# Altium PCB lightSoakV1-input-buffer-board-pcb.PcbDoc
Units mm, origin at the board's own origin, x right, y up, seen from the top; angles counter-clockwise.
Board outline 34.7 x 30.75 mm, 2 copper layers (Top Layer, Bottom Layer); 26 components, 26 nets, 94 pads, 22 vias.
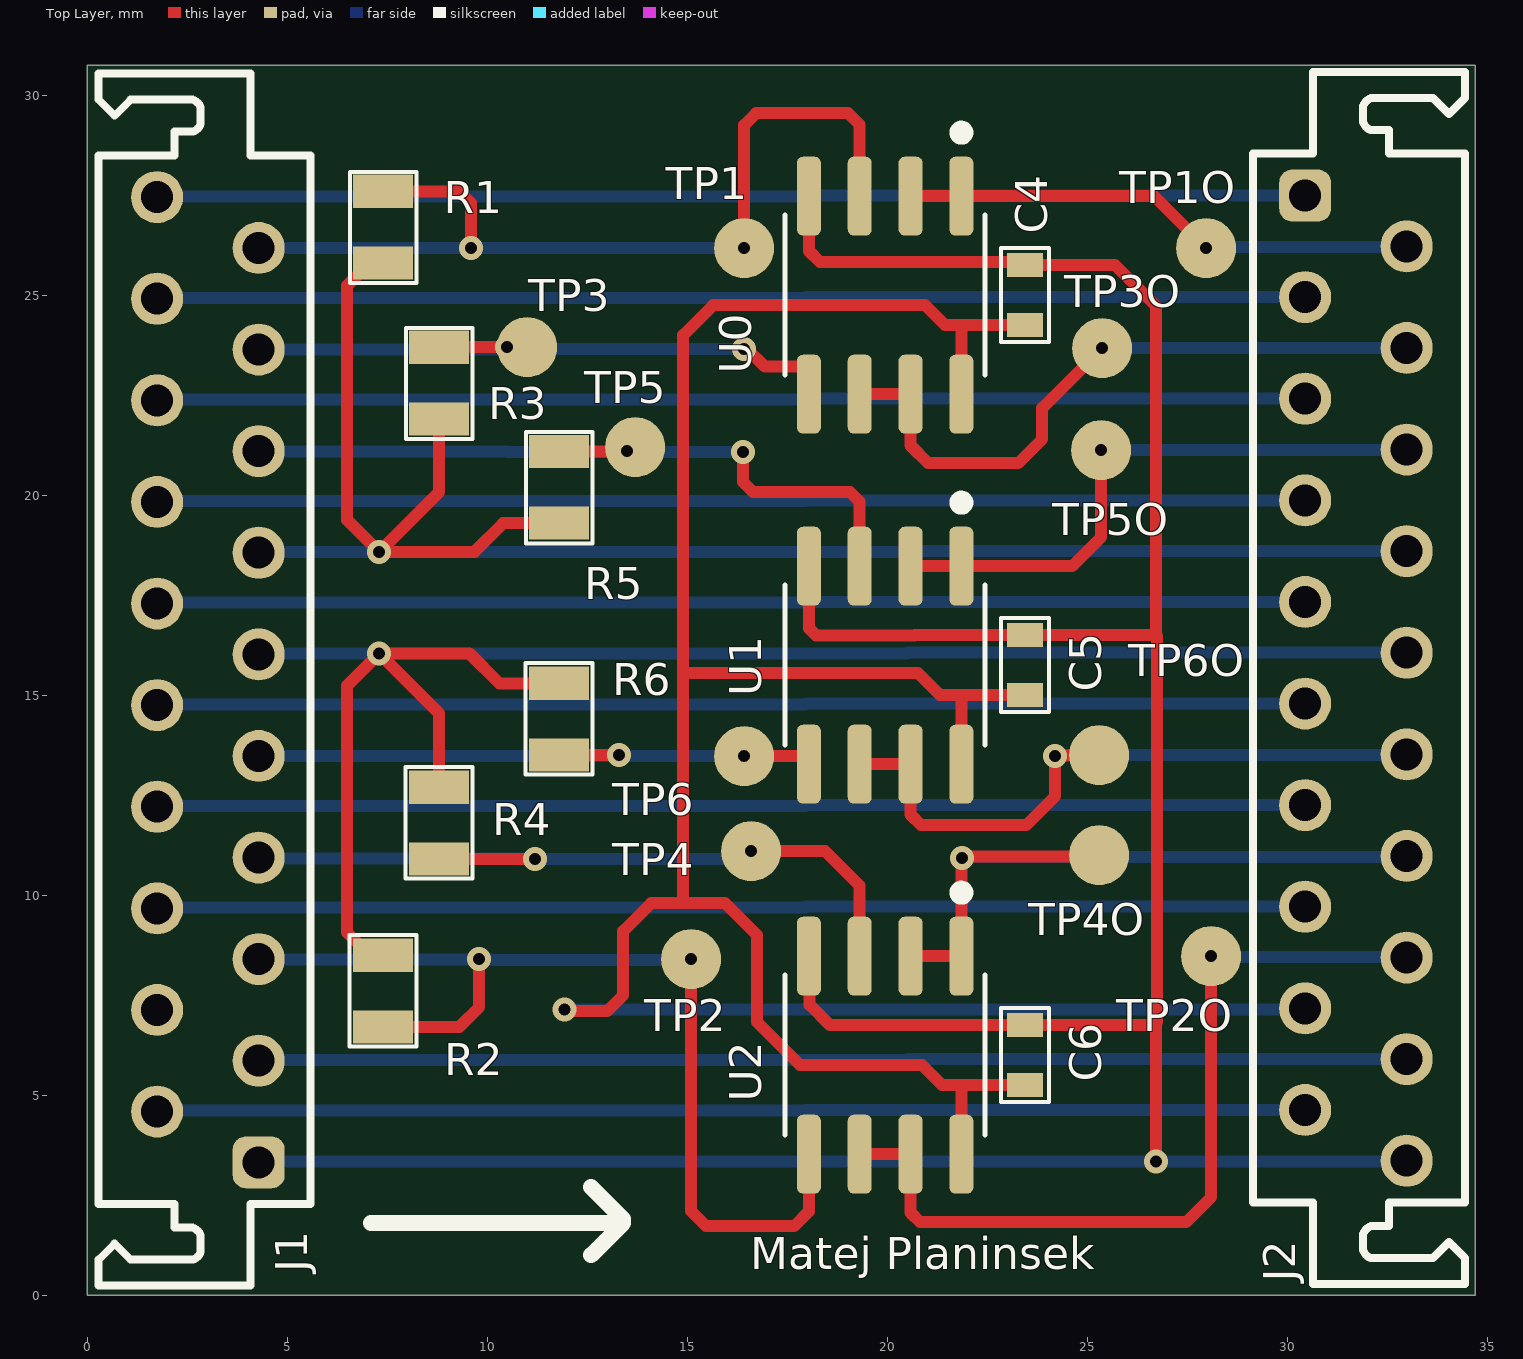
[diagram p0: Top Layer view]
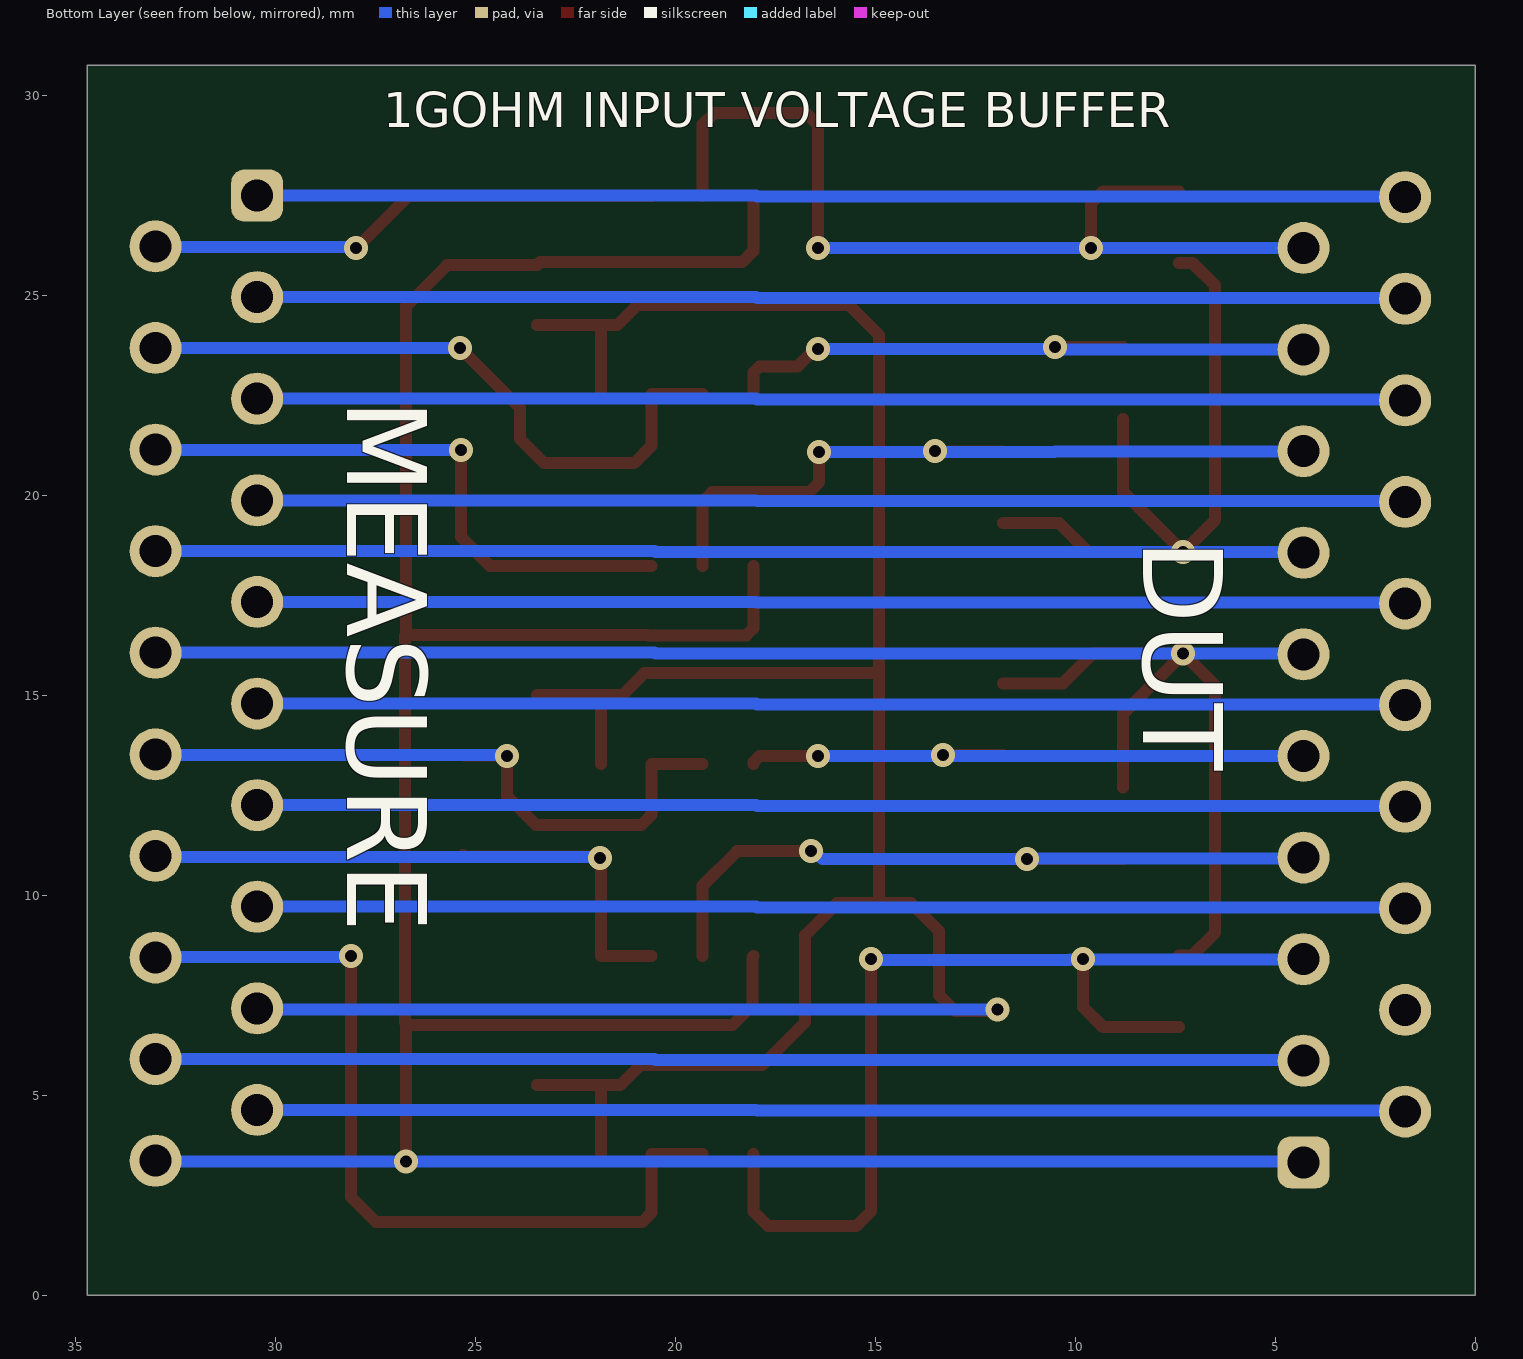
[diagram p1: Bottom Layer view, seen from below]
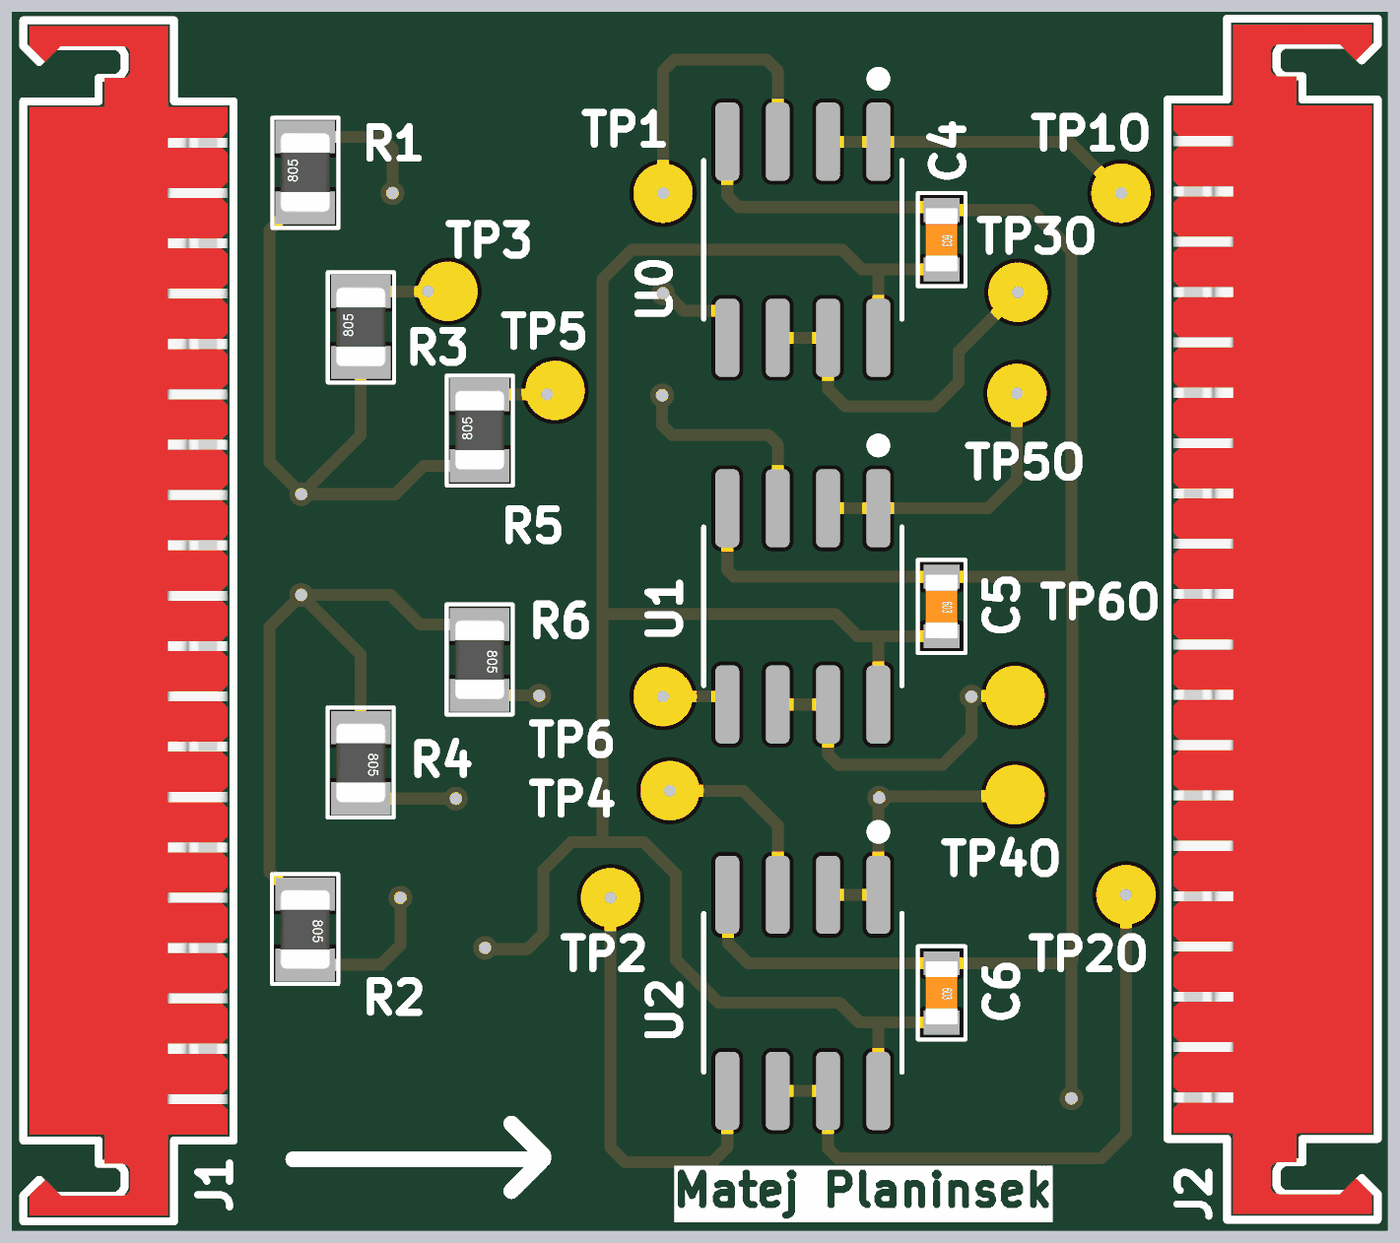
[diagram p2: 3D render of the assembled board from above, using the file's embedded part models]

## Layer stack, top to bottom
Top Solder: solder mask 0.0102, Solder Resist, Dk 3.5
Top Layer: signal copper 0.0356
Dielectric 1: dielectric 0.32, FR-4, Dk 4.8
Bottom Layer: signal copper 0.0356
Bottom Solder: solder mask 0.0102, Solder Resist, Dk 3.5

## Board outline
0,30.75 0,0 34.7,0 34.7,30.75

## Design rules (kind name [scope] priority, off if disabled: settings)
BoardOutlineClearance [All] p1: gap=0.2 ignorepadtopadclearanceinfootprint=FALSE
Clearance "proximity track clearance" [InNet('PROXIMITY') vs InNet('GND')] p1: gap=1.5 ignorepadtopadclearanceinfootprint=TRUE
Clearance "usb dif pair track clearance" [(InNet('USB_N') OR InNet('USB_P')) vs InNet('GND')] p2: gap=0.5 ignorepadtopadclearanceinfootprint=TRUE
Clearance [All] p3: gap=0.15 ignorepadtopadclearanceinfootprint=FALSE except(0.25: Arc-Hole Track-Hole THPad-Hole Via-Hole Fill-Hole Poly-Hole Region-Hole Text-Hole)
ComponentClearance [All] p1: gap=0 collisioncheckmode=3 verticalgap=0 showdistances=TRUE
DiffPairsRouting [All] p1: maxlimit=0.15 minlimit=0.15 mostfreqgap=0.15 toplayer_minwidth=0.2 toplayer_maxwidth=0.335 toplayer_prefwidth=0.335 bottomlayer_minwidth=0.2 bottomlayer_maxwidth=0.335 bottomlayer_prefwidth=0.335 impedanceprofiledriven=TRUE impedanceprofileid={C2F5FF65-82FF-485B-A6D6-999E515194F7} maxuncoupledlength=12.7
Height [All] p1: minheight=0 maxheight=1816.048 prefheight=12.7
HoleSize [All] p1: absolutevalues=TRUE maxlimit=6.3 minlimit=0.3 maxpercent=80.000 minpercent=20.000
HoleToHoleClearance [All] p1: gap=0.25 allowstackedmicrovias=FALSE
MinimumAnnularRing [All] p1: minimumring=0.076
MinimumSolderMaskSliver [All] p1: minsoldermaskwidth=0
PasteMaskExpansion [All] p1: expansion=0 percent=-10.000000
PlaneClearance [All] p1: clearance=0.102
PlaneConnect PlaneConnectPowerPads [InPadClass('PowerPads')] p1: planeconnectstyle=Direct reliefexpansion=0.508 reliefentries=4 reliefconductorwidth=0.254 reliefairgap=0.254
PlaneConnect [All] p2: pad.planeconnectstyle=Relief pad.reliefexpansion=0.3 pad.reliefentries=4 pad.reliefconductorwidth=0.102 pad.reliefairgap=0.102 via.planeconnectstyle=Direct via.reliefexpansion=0.3 via.reliefentries=4 via.reliefconductorwidth=0.127 via.reliefairgap=0.127
PolygonConnect PolygonConnectPowerPads [All vs (InPadClass('PowerPads'))] p1: connectstyle=Direct reliefconductorwidth=0.254 reliefentries=4 polygonreliefangle="90 Angle" airgapwidth=0.254
PolygonConnect [All] p2: thpad.connectstyle=Relief thpad.reliefconductorwidth=0.3 thpad.reliefentries=4 thpad.polygonreliefangle="90 Angle" thpad.airgapwidth=0.2 smdpad.connectstyle=Relief smdpad.reliefconductorwidth=0.2 smdpad.reliefentries=4 smdpad.polygonreliefangle="90 Angle" smdpad.airgapwidth=0.2 via.connectstyle=Direct via.reliefconductorwidth=0.127 via.reliefentries=4 via.polygonreliefangle="90 Angle" via.airgapwidth=0.127
RoutingVias [All] p1: holewidth=0.3 width=0.6 viastyle="Through Hole" minholewidth=0.2 minwidth=0.45 maxholewidth=6.3 maxwidth=6.55
SilkToSilkClearance [All] p1: silktosilkclearance=0
SilkToSolderMaskClearance [IsPad] p1: minsilkscreentomaskgap=0.08 clearancetoexposedcopper=TRUE
SolderMaskExpansion SolderMaskExpansion_VIAS [IsVia] p1: expansion=0.102 istentingtop=TRUE // SolderMask expansion for vias (defines tenting)
SolderMaskExpansion [All] p2: expansion=0.102 istentingtop=FALSE
Width [All] p1: maxlimit=1816.048 minlimit=0.09 preferedwidth=0.102 minimp=50.000000 maximp=50.000000 favimp=50.000000
19 further rules are at their usual default settings.

## Components (designator, comment, footprint, x,y, rotation, side; value= is the part's Value field where it differs from the comment)
C4 "C" FPR_0603_C_R0 23.45,25 r270 top value=TBD
C5 "C" FPR_0603_C_R0 23.45,15.75 r270 top value=TBD
C6 "C" FPR_0603_C_R0 23.45,6 r270 top value=TBD
J1 "690368192072" 690368192072 2.94,15.385 r270 top
J2 "690368192072" 690368192072 31.8,15.425 r90 top
R1 "R_1G" FPR_0805_R_R0 7.4,26.7 r90 top value=1G
R2 "R_1G" FPR_0805_R_R0 7.4,7.6 r270 top value=1G
R3 "R_1G" FPR_0805_R_R0 8.8,22.8 r90 top value=1G
R4 "R_1G" FPR_0805_R_R0 8.8,11.8 r270 top value=1G
R5 "R_1G" FPR_0805_R_R0 11.8,20.195 r90 top value=1G
R6 "R_1G" FPR_0805_R_R0 11.8,14.4 r270 top value=1G
TP1 "Test Point" "Test Point 1.5mm SMD" 16.425,26.175 r0 top
TP1O "Test Point" "Test Point 1.5mm SMD" 27.975,26.175 r90 top
TP2 "Test Point" "Test Point 1.5mm SMD" 15.1,8.4 r90 top
TP2O "Test Point" "Test Point 1.5mm SMD" 28.1,8.475 r90 top
TP3 "Test Point" "Test Point 1.5mm SMD" 11,23.7 r90 top
TP3O "Test Point" "Test Point 1.5mm SMD" 25.375,23.675 r90 top
TP4 "Test Point" "Test Point 1.5mm SMD" 16.6,11.1 r90 top
TP4O "Test Point" "Test Point 1.5mm SMD" 25.3,11 r90 top
TP5 "Test Point" "Test Point 1.5mm SMD" 13.7,21.2 r90 top
TP5O "Test Point" "Test Point 1.5mm SMD" 25.35,21.125 r90 top
TP6 "Test Point" "Test Point 1.5mm SMD" 16.425,13.475 r90 top
TP6O "Test Point" "Test Point 1.5mm SMD" 25.3,13.5 r90 top
U0 "AD8606ARZ" SOIC127P600X175-8N 19.95,25 r270 top
U1 "AD8606ARZ" SOIC127P600X175-8N 19.95,15.75 r270 top
U2 "AD8606ARZ" SOIC127P600X175-8N 19.95,6 r270 top

## Footprints (in the part's own frame and the unit in brackets; to place one, negate y for a bottom-side part, rotate by r counter-clockwise, add the part's x,y. Pads: shape width x height; smd on the part's side, far side on the other; paste and mask are expansions set on the pad)
690368192072 [mm] "MiniModule Connectors, PCB Type, Female, THT, Angled, 20p"
  rrect50% 1.3x1.3 hole 0.8: 1(12.065,1.35)
  round 1.3 hole 0.8: 2(10.795,-1.19) 3(9.525,1.35) 4(8.255,-1.19) 5(6.985,1.35) 6(5.715,-1.19) 7(4.445,1.35) 8(3.175,-1.19) 9(1.905,1.35) 10(0.635,-1.19) 11(-0.635,1.35) 12(-1.905,-1.19) 13(-3.175,1.35) 14(-4.445,-1.19) 15(-5.715,1.35) 16(-6.985,-1.19) 17(-8.255,1.35) 18(-9.525,-1.19) 19(-10.795,1.35) 20(-12.065,-1.19)
  silkscreen extent -15.15,-2.65 15.15,2.65, body extent -15,-2.5 15,2.5, height 5.85
FPR_0603_C_R0 [mm] "SMD Reflow"
  rect 0.6x0.9 smd: 1(-0.75,0) 2(0.75,0)
  silkscreen extent -1.17,-0.6 1.18,0.6, body extent -0.8,-0.4 0.8,0.4, height 0.32
FPR_0805_R_R0 [mm] "SMD Reflow"
  rect 0.83x1.5 smd: 1(-0.895,0) 2(0.895,0)
  silkscreen extent -1.4,-0.84 1.38,0.83, body extent -1,-0.62 1,0.63, height 0.8
SOIC127P600X175-8N [mm]
  rrect50% 1.97x0.6 smd: 1(-2.475,1.905) 2(-2.475,0.635) 3(-2.475,-0.635) 4(-2.475,-1.905) 5(2.475,-1.905) 6(2.475,-0.635) 7(2.475,0.635) 8(2.475,1.905)
  silkscreen extent -4.21,-2.5 2,2.5
"Test Point 1.5mm SMD" [mm] "1.5mm circle SMD test point"
  round 1.5 smd paste-2539.97: 1(0,0)

## Part data
C4 C5 C6: "Capacitor - generic SMD"
J1 J2: "WR-MM Mini Module Connector, Female, THT, with Latch & Polarization, Angled, pitch 2.54mm, 20p", Contact Resistance=10mΩ, Insulation Resistance=1000MΩ, Manufacturer="Wurth Elektronik", Operating Temperature Max=105°C, Operating Temperature Min=-40°C, Rated Current=1.5A, Withstanding Voltage=500VAC, Working Voltage=250VAC, Category="Board-to-Board Connectors", ComponentLink1Description="Website Link", ComponentLink1URL=https://www.we-online.com/redexpert/article/690368192072?ad, ComponentLink2Description="Datasheet Link", ComponentLink2URL=https://www.we-online.com/redexpert/spec/690368192072?ad, Gender=Female, Length=30mm, Manufacturer Part Number=690368192072, Match Code=WR-MM, Mount="Through Hole", Number of Pins=20, Orientation=Angled, Packaging=Tube, Pitch=2.54mm
R1 R2 R3 R4 R5 R6: library part R, "Resistor - generic SMD"
U0 U1 U2: "Dual rail to rail OP-AMP", Package="SOIC-8 Analog Devices", Availability=Unavailable, MF="Analog Devices", MP=AD8606ARZ, Price=None, SnapEDA_Link=https://www.snapeda.com/parts/AD8606ARZ/Analog%20Devices%20Inc./view-part/43414/?ref=snap

## Via types
v1: diameter 0.6, hole 0.3, Top Layer to Bottom Layer, tented both sides, 22 vias

## Nets (pads, with @x,y where several pads share a name; then routed paths per layer and width w, separated by ;. In a path a pad name is that pad's centre, name@x,y a point inside that pad or via, vN(x,y) a via of type N, cw(c..) or ccw(c..) an arc to the next point about the centre after c; other vN are vias at no path point)
+3V3: J1.3 J2.18 | length 28.7
  Bottom Layer w0.3: J1.3 4.31,5.88 20.494,5.88 20.514,5.9 J2.18
+5V: C4.2 C5.2 C6.2 J2.17 U0.8 U1.8 U2.8 | length 72.5
  Top Layer w0.3: v1(11.935,7.135) 11.97,7.1 13,7.1 13.4,7.5 13.4,9.1 14.1,9.8 14.9,9.8 ; U2.8 21.855,5.205 21.9,5.25 ; U1.8 21.855,15 ; U0.8 21.855,24.25 ; C6.2 21.9,5.25 ; C5.2 21.855,15 ; C4.2 21.855,24.25 ; 14.9,9.8 14.9,15.55 ; 14.9,9.8 15.95,9.8 16.75,9 16.75,6.825 17.825,5.75 20.875,5.75 21.375,5.25 21.9,5.25 ; 14.9,15.55 14.9,24 15.65,24.75 20.95,24.75 21.45,24.25 21.855,24.25 ; 14.9,15.55 20.775,15.55 21.325,15 21.855,15
  Bottom Layer w0.3: v1(11.935,7.135) 30.415,7.135 J2.17
DUT-A1: J1.19 R1.2 TP1.1 U0.3 | length 23.6
  Top Layer w0.3: R1.2 9.305,27.595 9.6,27.3 v1(9.6,26.177) ; v1(16.425,26.175) 16.425,29.25 16.725,29.55 19.025,29.55 19.315,29.26 U0.3
  Bottom Layer w0.3: J1.19 4.292,26.177 v1(9.6,26.177) 10.518,26.177 10.52,26.175 v1(16.425,26.175)
DUT-A1-BUFFD: J2.2 TP1O.1 U0.1 U0.2 | length 13
  Top Layer w0.3: U0.2 U0.1 26.675,27.475 v1(27.975,26.175)
  Bottom Layer w0.3: v1(27.975,26.175) 27.997,26.197 32.967,26.197 J2.2
DUT-A2: J1.20 J2.1 | length 28.7
  Bottom Layer w0.3: J1.20 1.77,27.47 17.954,27.47 17.974,27.49 J2.1
DUT-B1: J1.5 R2.2 TP2.1 U2.5 | length 25.6
  Top Layer w0.3: R2.2 9.305,6.705 9.8,7.2 v1(9.8,8.4) ; v1(15.1,8.4) 15.1,2.1 15.475,1.725 17.675,1.725 18.045,2.095 U2.5
  Bottom Layer w0.3: J1.5 4.302,8.387 9.8,8.387 10.125,8.387 10.138,8.375 15.075,8.375 v1(15.1,8.4)
DUT-B1-BUFFD: J2.16 TP2O.1 U2.6 U2.7 | length 21.5
  Top Layer w0.3: U2.6 U2.7 20.585,2.065 20.826,1.824 21.074,1.824 ; 21.075,1.825 27.475,1.825 28.1,2.45 v1(28.1,8.475)
  Bottom Layer w0.3: v1(28.1,8.475) 28.117,8.458 32.972,8.458 J2.16
DUT-B2: J1.6 J2.15 | length 28.7
  Bottom Layer w0.3: J1.6 1.77,9.69 17.954,9.69 17.974,9.71 J2.15
DUT-BB11: J1.13 J2.8 R1.1 R3.1 R5.1 | length 45.6
  Top Layer w0.3: R1.1 7.065,25.805 6.5,25.24 6.5,19.38 v1(7.3,18.58) ; R3.1 8.8,20.08 v1(7.3,18.58) ; R5.1 10.4,19.3 9.68,18.58 v1(7.3,18.58)
  Bottom Layer w0.3: J1.13 4.31,18.58 v1(7.3,18.58) 20.494,18.58 20.514,18.6 J2.8
DUT-BB12: J1.14 J2.7 | length 28.7
  Bottom Layer w0.3: J1.14 1.77,19.85 17.954,19.85 17.974,19.87 J2.7
DUT-BB21: J1.11 J2.10 R2.1 R4.1 R6.1 | length 45.9
  Top Layer w0.3: R2.1 7.065,8.495 6.5,9.06 6.5,15.24 v1(7.3,16.04) ; R4.1 8.8,14.54 v1(7.3,16.04) ; R6.1 10.305,15.295 9.56,16.04 v1(7.3,16.04)
  Bottom Layer w0.3: J1.11 4.31,16.04 v1(7.3,16.04) 20.494,16.04 20.514,16.06 J2.10
DUT-BB22: J1.12 J2.9 | length 28.7
  Bottom Layer w0.3: J1.12 1.77,17.31 17.954,17.31 17.974,17.33 J2.9
DUT-C1: J1.17 R3.2 TP3.1 U0.5 | length 16.2
  Top Layer w0.3: R3.2 8.803,23.697 10.497,23.697 v1(10.5,23.7) ; v1(16.425,23.65) 16.506,23.65 16.946,23.21 17.895,23.21 18.045,23.06 U0.5
  Bottom Layer w0.3: J1.17 4.295,23.645 10.517,23.645 10.522,23.65 v1(16.425,23.65)
DUT-C1-BUFFD: J2.4 TP3O.1 U0.6 U0.7 | length 16.8
  Top Layer w0.3: U0.6 U0.7 20.585,21.24 21.025,20.8 23.275,20.8 23.875,21.4 23.875,22.175 v1(25.375,23.675)
  Bottom Layer w0.3: v1(25.375,23.675) 25.377,23.677 32.987,23.677 J2.4
DUT-C2: J1.18 J2.3 | length 28.7
  Bottom Layer w0.3: J1.18 1.77,24.93 17.954,24.93 17.974,24.95 J2.3
DUT-D1: J1.7 R4.2 TP4.1 U2.3 | length 19.6
  Top Layer w0.3: R4.2 8.802,10.903 11.197,10.903 v1(11.2,10.9) ; v1(16.6,11.1) 18.45,11.1 19.315,10.235 U2.3
  Bottom Layer w0.3: J1.7 4.31,10.92 11.18,10.92 v1(11.2,10.9) 16.319,10.9 16.519,11.1 v1(16.6,11.1)
DUT-D1-BUFFD: J2.14 TP4O.1 U2.1 U2.2 | length 18.3
  Top Layer w0.3: U2.2 U2.1 21.855,10.905 v1(21.875,10.925) 21.913,10.963 25.262,10.963 TP4O.1
  Bottom Layer w0.3: v1(21.875,10.925) 21.903,10.953 32.962,10.953 J2.14
DUT-D2: J1.8 J2.13 | length 28.7
  Bottom Layer w0.3: J1.8 1.77,12.23 17.954,12.23 17.974,12.25 J2.13
DUT-E1: J1.15 R5.2 TP5.1 U1.3 | length 19.3
  Top Layer w0.3: R5.2 11.805,21.095 13.495,21.095 v1(13.5,21.1) ; v1(16.4,21.075) 16.4,20.325 16.65,20.075 19.075,20.075 19.315,19.835 U1.3
  Bottom Layer w0.3: J1.15 4.302,21.087 10.5,21.087 10.513,21.075 v1(16.4,21.075)
DUT-E1-BUFFD: J2.6 TP5O.1 U1.1 U1.2 | length 14.9
  Top Layer w0.3: U1.2 U1.1 24.625,18.225 25.35,18.95 v1(25.35,21.125)
  Bottom Layer w0.3: v1(25.35,21.125) 25.358,21.133 32.982,21.133 J2.6
DUT-E2: J1.16 J2.5 | length 28.7
  Bottom Layer w0.3: J1.16 1.77,22.39 17.954,22.39 17.974,22.41 J2.5
DUT-F1: J1.9 R6.2 TP6.1 U1.5 | length 15.4
  Top Layer w0.3: R6.2 11.802,13.503 13.297,13.503 v1(13.3,13.5) ; v1(16.425,13.475) 17.895,13.475 18.045,13.325 U1.5
  Bottom Layer w0.3: J1.9 4.292,13.477 10.518,13.477 10.52,13.475 v1(16.425,13.475)
DUT-F1-BUFFD: J2.12 TP6O.1 U1.6 U1.7 | length 17.5
  Top Layer w0.3: U1.6 U1.7 20.585,12.015 20.85,11.75 23.475,11.75 24.2,12.475 v1(24.2,13.475) 24.213,13.488 25.288,13.488 TP6O.1
  Bottom Layer w0.3: v1(24.2,13.475) 24.223,13.498 32.968,13.498 J2.12
DUT-F2: J1.10 J2.11 | length 28.7
  Bottom Layer w0.3: J1.10 1.77,14.77 17.954,14.77 17.974,14.79 J2.11
GND: C4.1 C5.1 C6.1 J1.1 J2.20 U0.4 U1.4 U2.4 | length 81.2
  Top Layer w0.3: U2.4 18.062,8.458 18.062,7.259 18.571,6.75 C6.1 26.675,6.75 26.725,6.8 ; U1.4 18.045,16.67 18.221,16.494 20.682,16.494 20.688,16.5 C5.1 26.725,16.5 ; U0.4 18.045,26.105 18.325,25.825 23.375,25.825 C4.1 25.7,25.75 26.725,24.725 26.725,16.5 ; v1(26.725,3.34) 26.725,6.8 ; 26.725,6.8 26.75,6.825 26.75,16.475 26.725,16.5
  Bottom Layer w0.3: J1.1 4.31,3.34 32.97,3.34 J2.20
TEMP-SNS-ONEWIRE: J1.2 J2.19 | length 28.7
  Bottom Layer w0.3: J1.2 1.77,4.61 17.954,4.61 17.974,4.63 J2.19
pads on no net: J1.4

## Silkscreen, mask and mechanical layers (free items; w line width, h text height)
Top Overlay:
  lines w0.4: 7.1,1.8 13.4,1.8 ; 12.6,2.7 13.4,1.9 13.4,1.8 ; 12.6,1 13.4,1.8 ; 12.6,1 12.6,1 ; 12.6,1 13.4,1.8
  text "Matej Planinsek" at 16.58,0.647 h0.8
Bottom Overlay:
  text "1GOHM INPUT VOLTAGE BUFFER" at 27.3,28.913 h1.5
  text "MEASURE" at 28.2,22.4 h2 r90
  text "DUT" at 8.3,18.9 h2 r90